# Altium PCB PCB-Support-STM32F407-2layers-polygon-EMI.PcbDoc (part 1 of 3)
Units mm, origin at the board's own origin, x right, y up, seen from the top; angles counter-clockwise.
Board outline 200 x 110 mm, 2 copper layers (Top Layer, Bottom Layer), stack 1.569 mm thick; 116 components, 132 nets, 504 pads, 174 vias.
Unrouted connection lines stored in the file: 143.
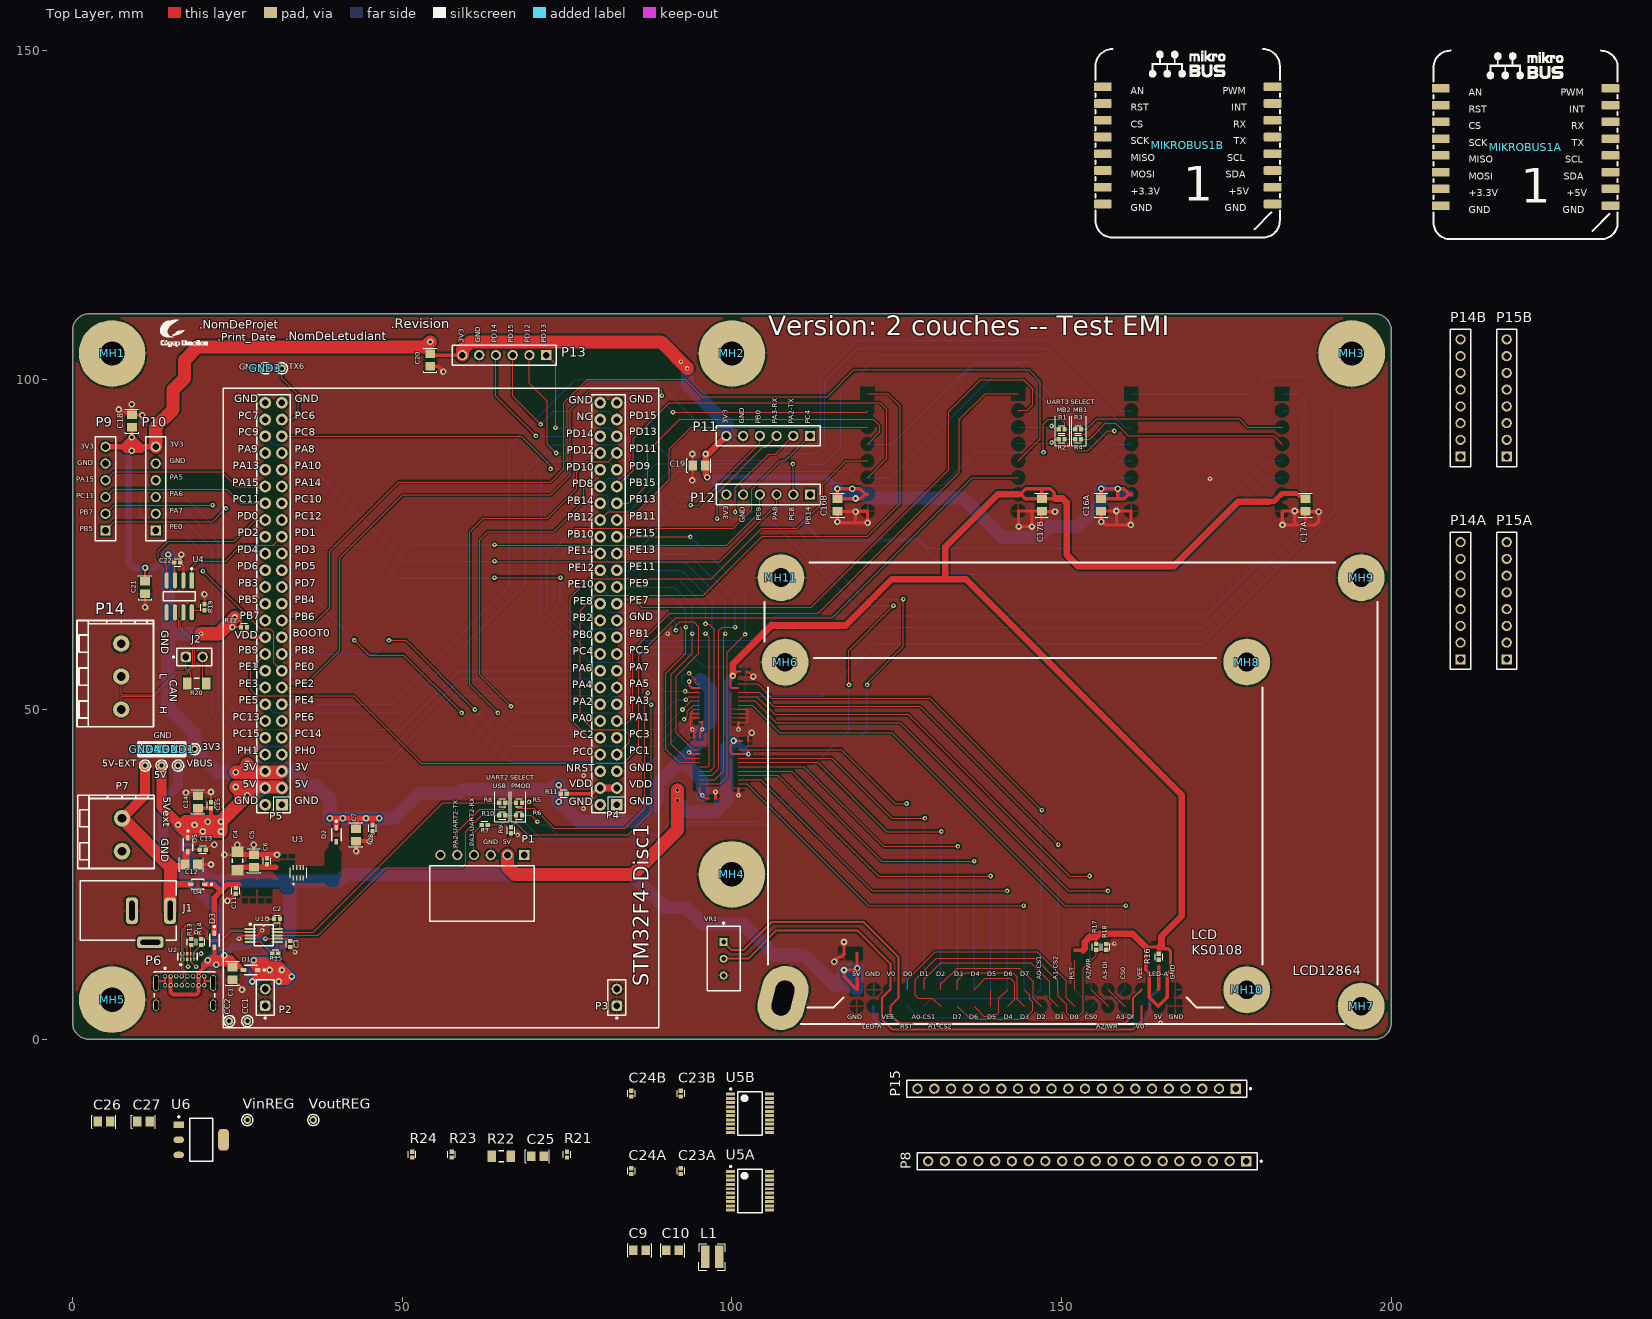
[diagram p0: Top Layer view]
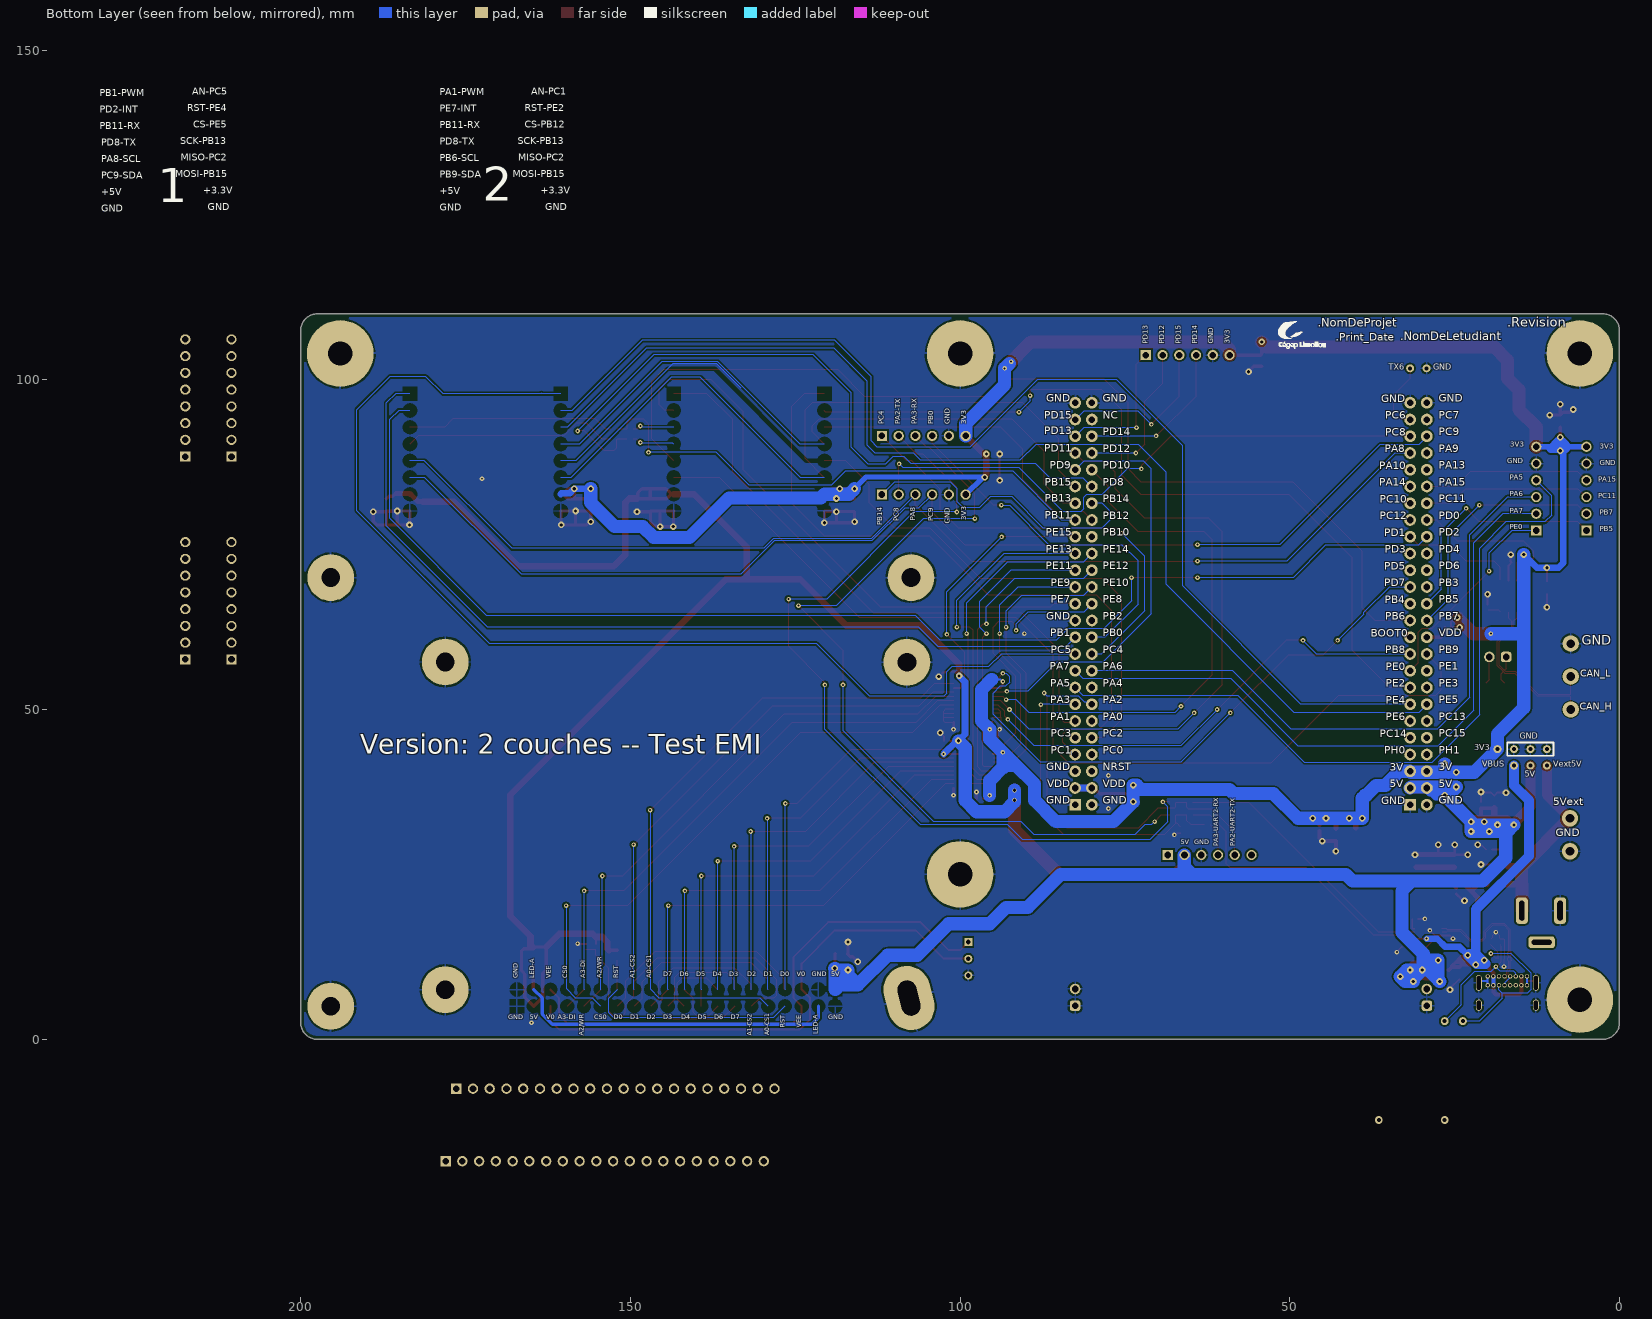
[diagram p1: Bottom Layer view, seen from below]

## Layer stack, top to bottom
Top Solder: solder mask 0.0254, SM-001, Dk 4
Top Layer: signal copper 0.035
Dielectric 1: core 1.4986, Core-043, Dk 4.3
Bottom Layer: signal copper 0.035
Bottom Solder: solder mask 0.0254, SM-001, Dk 4

## Board outline
2.5,0 cw(c2.5,2.5) 0,2.5 0,107.5 cw(c2.5,107.5) 2.5,110 197.5,110 cw(c197.5,107.5) 200,107.5 200,2.5 cw(c197.5,2.5) 197.5,0

## Design rules (kind name [scope] priority, off if disabled: settings)
BoardOutlineClearance [All] p1: gap=0.5 ignorepadtopadclearanceinfootprint=FALSE
Clearance Clearance_diifPair [InDifferentialPair('CAN') or InDifferentialPair('USB_D')] p1: gap=0.125 ignorepadtopadclearanceinfootprint=FALSE
Clearance Clearance_poly [inpoly] p2: gap=0.25 ignorepadtopadclearanceinfootprint=FALSE
Clearance [All] p3: gap=0.15 ignorepadtopadclearanceinfootprint=FALSE
DiffPairsRouting [All] p1: maxlimit=0.125 minlimit=0.125 mostfreqgap=0.125 toplayer_minwidth=0.125 toplayer_maxwidth=0.125 toplayer_prefwidth=0.125 bottomlayer_minwidth=0.125 bottomlayer_maxwidth=0.125 bottomlayer_prefwidth=0.125 maxuncoupledlength=15
HoleSize [All] p1: absolutevalues=TRUE maxlimit=5.5 minlimit=0.2 maxpercent=80.000 minpercent=20.000
HoleToHoleClearance [All] p1: gap=0.3 allowstackedmicrovias=TRUE
MinimumSolderMaskSliver [All] p1: minsoldermaskwidth=0.099
PlaneClearance [All] p1: clearance=0.5
PlaneConnect [All] p1: pad.planeconnectstyle=Relief pad.reliefexpansion=0.25 pad.reliefentries=4 pad.reliefconductorwidth=0.5 pad.reliefairgap=0.25 via.planeconnectstyle=Direct via.reliefexpansion=0.508 via.reliefentries=4 via.reliefconductorwidth=0.254 via.reliefairgap=0.254
PolygonConnect [All] p1: thpad.connectstyle=Relief thpad.reliefconductorwidth=0.3 thpad.reliefentries=4 thpad.polygonreliefangle="90 Angle" thpad.airgapwidth=0.3 smdpad.connectstyle=Relief smdpad.reliefconductorwidth=0.3 smdpad.reliefentries=4 smdpad.polygonreliefangle="90 Angle" smdpad.airgapwidth=0.3 via.connectstyle=Direct via.reliefconductorwidth=0.254 via.reliefentries=4 via.polygonreliefangle="90 Angle" via.airgapwidth=0.254
RoutingVias [All] p1: holewidth=0.5 width=1 viastyle="Through Hole" minholewidth=0.3 minwidth=0.6 maxholewidth=0.7 maxwidth=1.2
SilkToSilkClearance [All] p1: silktosilkclearance=0
SilkToSolderMaskClearance [IsPad] p1: minsilkscreentomaskgap=0 clearancetoexposedcopper=TRUE
SolderMaskExpansion [All] p1: expansion=0.05 istentingtop=FALSE
SupplyNets "Schematic Supply Nets_7" [InNet('VDDB')] p1: voltage=0.000
SupplyNets "Schematic Supply Nets_5" [InNet('VDDA')] p2: voltage=0.000
SupplyNets "Schematic Supply Nets_4" [InNet('V5V_EXT')] p3: voltage=0.000
SupplyNets "Schematic Supply Nets_3" [InNet('VBUS')] p4: voltage=0.000
SupplyNets "Schematic Supply Nets_2" [InNet('VCC_3V3')] p5: voltage=0.000
SupplyNets "Schematic Supply Nets_1" [InNet('VCC_5V')] p6: voltage=0.000
SupplyNets "Schematic Supply Nets" [InNet('GND')] p7: voltage=0.000
Width [All] p1: maxlimit=5 minlimit=0.125 preferedwidth=0.15
22 further rules are at their usual default settings.

## Classes and differential pairs
component class USB-Power: C1 C2 C3 CC1 CC2 P6 R13 R14 R15 U1 U2
channel class Level-Translator: Level-Translator1 Level-Translator2
component class Level-Translator2: C23B C24B U5B
component class Level-Translator1: C23A C24A U5A
component class LCD-Connecteur-ST7920: MH9 MH10 MH11 P15
component class Affichage-LCD: C25 R21 R22 R23 R24 VR1
component class CAN-Driver: C21 C22 J2 P14 R19 R20 U4
net class PMOD: PA5/SPI1-CLK PA6/SPI1-MISO PA7/SPI1-MOSI PA8/I2C3-SCL PA15/D3 PB0/D1 PB5/D0 PB7/D1 PB14/D2 PC4/D0 PC8/D3 PC9/I2C3-SDA PC11/D2 PD12 PD13 PD14 PD15 PE0/CS_B PMOD-RX PMOD-TX
net class MB2: MB1-RX MB1-TX PA8/I2C3-SCL PB1/TIM-3/8 PB13/SPI2-SCK PB15/SPI2-MOSI PC2/SPI2-MISO PC5/ADC12-IN15 PC9/I2C3-SDA PD2/INT PE4/RST PE5/CS
net class MB1: MB2-RX MB2-TX PA1/TIM-2/5 PB6/I2C1-SCL PB9/I2C1-SDA PB12/CS PB13/SPI2-SCK PB15/SPI2-MOSI PC1/ADC123-IN11 PC2/SPI2-MISO PE2/RST PE7/INT
net class LCD: PB8/CS0 PD7/A0 PD9/A1 PD10/A2 PD11/A3 PE8/D0 PE9/D1 PE10/D2 PE11/D3 PE12/D4 PE13/D5 PE14/D6 PE15/D7
net class USB-CAN: PD0/CAN-RX PD1/CAN-TX USB-UART-RX USB-UART-TX
component class U_Alimentation: 3V3 5V 5V-EXT C4 C5 C6 C7 C8 C9 C10 C11 C12 C13 C14 C15 C26 C27 D1 D2 D3 D4 D5 GND1 GND2 GND4 J1 L1 P7 R16 R17 R18 U3 U6 VBUS VinREG VoutREG
component class PMOD-Connecteur: C18 C19 C20 P9 P10 P11 P12 P13 PMOD_1 PMOD_2
channel class MikroBus-Connecteur: "MikroBus-Connecteur 1" "MikroBus-Connecteur 2"
component class "MikroBus-Connecteur 2": C16B C17B MIKROBUS1 MIKROBUS1B P14B P15B
component class "MikroBus-Connecteur 1": C16A C17A MIKROBUS1A MIKROBUS2 P14A P15A
component class LCD-Connecteur-KS0108: MH6 MH7 MH8 P8
component class STM32Disc1-Interface: P2 P3 P4 P5 R11 R12
component class PCB-Support-STM32F407: GND3 m MH1 MH2 MH3 MH4 MH5 P1 R1 R2 R3 R4 R5 R6 R7 R8 R9 R10 TX6
differential pair USB_D: +USB_D_P -USB_D_N
differential pair CAN: +CAN_P -CAN_N

## Components (designator, comment, footprint, x,y, rotation, side; value= is the part's Value field where it differs from the comment)
3V3 "DNP" TP_TH061 18.5,44 r90 top locked
5V "DNP" TP_TH061 13.5,41.5 r90 top locked
5V-EXT "DNP" TP_TH061 11,41.5 r90 top locked
C1 "Cap 4.7uF 0805" C_2012[0805] 24.25,10 r90 top value=4.7uF
C2 "Cap 100nF 0402" C_1005[0402] 31,18.25 r0 top value=100nF
C3 "Cap 100nF 0402" C_1005[0402] 33,14.45 r90 top value=100nF
C4 "Cap 100uF 1206" C_3216[1206] 25,27.05 r270 top value=100uF
C5 "Cap 4.7uF 0805" C_2012[0805] 27.5,27.05 r270 top value=4.7uF
C6 "Cap 100nF 0402" C_1005[0402] 29.5,27 r270 top value=100nF
C7 "Cap 4.7uF 0805" C_2012[0805] 43,31 r90 top value=4.7uF
C8 "Cap 100nF 0402" C_1005[0402] 45.5,32 r90 top value=100nF
C9 "CAP CER 10uF 25V X5R 0805" C_2012[0805] 86,-32 r0 top value=10uF
C10 "CAP CER 10uF 25V X5R 0805" C_2012[0805] 91,-32 r0 top value=10uF
C11 "Cap 100nF 0402" C_1005[0402] 24.75,22.5 r90 top value=100nF
C12 "Cap 4.7uF 0805" C_2012[0805] 18,26.5 r180 top value=4.7uF
C13 "Cap 100nF 0402" C_1005[0402] 19.75,28.75 r180 top value=100nF
C14 "Cap 4.7uF 0805" C_2012[0805] 19,36 r270 top value=4.7uF
C15 "Cap 100nF 0402" C_1005[0402] 21,35.5 r270 top value=100nF
C16A "Cap 4.7uF 0805" C_2012[0805] 156,81 r90 top value=4.7uF (schematic designator C16)
C16B "Cap 4.7uF 0805" C_2012[0805] 116,81 r90 top value=4.7uF (schematic designator C16)
C17A "Cap 4.7uF 0805" C_2012[0805] 187,81 r90 top value=4.7uF (schematic designator C17)
C17B "Cap 4.7uF 0805" C_2012[0805] 147,81 r90 top value=4.7uF (schematic designator C17)
C18 "Cap 4.7uF 0805" C_2012[0805] 9,93.75 r270 top value=4.7uF
C19 "Cap 4.7uF 0805" C_2012[0805] 95,87 r0 top value=4.7uF
C20 "Cap 4.7uF 0805" C_2012[0805] 54.25,103 r90 top value=4.7uF
C21 "Cap 4.7uF 0805" C_2012[0805] 11,68.5 r90 top value=4.7uF
C22 "Cap 100nF 0402" C_1005[0402] 15.89,72.31 r180 top value=100nF
C23A "Cap 100nF 0402" C_1005[0402] 92.25,-20 r90 top value=100nF (schematic designator C23)
C23B "Cap 100nF 0402" C_1005[0402] 92.25,-8.25 r90 top value=100nF (schematic designator C23)
C24A "Cap 100nF 0402" C_1005[0402] 84.75,-20 r90 top (schematic designator C24)
C24B "Cap 100nF 0402" C_1005[0402] 84.75,-8.25 r90 top (schematic designator C24)
C25 "Cap 4.7uF 0805" C_2012[0805] 70.499,-17.75 r0 top value=4.7uF
C26 "CAP CER 10uF 25V X5R 0805" C_2012[0805] 4.75,-12.5 r0 top value=DNP
C27 "CAP CER 10uF 25V X5R 0805" C_2012[0805] 10.75,-12.5 r0 top value=DNP
CC1 "DNP" TP_TH061 26.5,2.75 r0 top
CC2 "DNP" TP_TH061 23.75,2.75 r90 top
D1 "BAT60JFILM" SOD323 27,10.5 r180 top
D2 "BAT60JFILM" SOD323 40,31 r270 top
D3 "BAT60JFILM" SOD323 21.5,15 r270 top
D4 "BAT60JFILM" SOD323 19,23.5 r180 top
D5 "BAT60JFILM" SOD323 17.5,29.5 r270 top
GND1 "GND" TP_TH061 16,44 r0 top locked value=DNP
GND2 "GND" TP_TH061 13.5,44 r90 top locked value=DNP
GND3 "GND" TP_TH061 29.25,101.75 r0 top value=DNP
GND4 "GND" TP_TH061 11,44 r0 top locked value=DNP
J1 "694106301002" CONN_DC-JACK_RA 8.45,19.5 r270 top
J2 "61300211121" CONN_HDR_2POS_100MILS_TH 18.455,57.975 r0 top value=R120
L1 "Ind 1UH 2.75A 51mOHM SMD" L_3030[1212] 97,-33 r0 top value=1uH
MH1 "DNP" MP_M-Hole_#4-40_LOOSE-FIT 6,104 r0 top locked
MH2 "DNP" MP_M-Hole_#4-40_LOOSE-FIT 100,104 r90 top locked
MH3 "DNP" MP_M-Hole_#4-40_LOOSE-FIT 194,104 r90 top locked
MH4 "DNP" MP_M-Hole_#4-40_LOOSE-FIT 100,25 r0 top locked
MH5 "DNP" MP_M-Hole_#4-40_LOOSE-FIT 6,6 r0 top locked
MH6 "DNP" MP_M-Hole_M2.5x0.45mm_LOOSE-FIT 108.066,57.184 r90 top
MH7 "DNP" MP_M-Hole_M2.5x0.45mm_LOOSE-FIT 195.441,5.009 r90 top locked
MH8 "DNP" MP_M-Hole_M2.5x0.45mm_LOOSE-FIT 178.066,57.209 r90 top locked
MH9 "DNP" MP_M-Hole_M2.5x0.45mm_LOOSE-FIT 195.441,70.009 r90 top locked
MH10 "DNP" MP_M-Hole_M2.5x0.45mm_LOOSE-FIT 178.066,7.509 r90 top locked
MH11 "DNP" MP_M-Hole_M2.5x0.45mm_LOOSE-FIT 107.441,70.009 r90 top locked
MIKROBUS1A "MIKROBUS HOST CONN." "MIKROBUS HOST CONN. SMD-NO HOLE" 220.37,134.472 r0 top (schematic designator MIKROBUS1)
MIKROBUS1B "MIKROBUS HOST CONN." "MIKROBUS HOST CONN. SMD-NO HOLE" 169.12,134.722 r0 top (schematic designator MIKROBUS1)
P1 "PPTC061LGBN-RC" P_CONN_HDR_1ROW_6POS_RA_100MIL 62.15,27.94 r180 top
P2 "ZX-PM2.54-1-2PY" CONN_SKT_2POS_100MILS_TH 29.21,6.35 r90 top
P3 "ZX-PM2.54-1-2PY" CONN_SKT_2POS_100MILS_TH 82.55,6.35 r90 top
P4 "ZX-PM2.54-2-25PY" CONN-HEAD02X25-100MIL 81.28,66.04 r90 top
P5 "ZX-PM2.54-2-25PY" CONN-HEAD02X25-100MIL 30.48,66.04 r90 top
P6 "USB4085-GF-A" FP-USB4085-GF-A-MFG 17,5.5 r0 top
P7 "ZX-DG28V-5.0-2P" CONN_TERM_BLOCK_2POS_5mm_Model1 7.5,31 r90 top
P8 "ESQ-120-14-G-S" CONN-SKT-20POS-100MIL 153.89,-18.5 r180 top
P9 "ZX-PM2.54-1-6PY" CONN_SKT_01X06_100MIL 5,83.5 r90 top locked
P10 "ZX-PM2.54-1-6PY" CONN_SKT_01X06_100MIL 12.62,83.5 r90 top locked
P11 "ZX-PM2.54-1-6PY" CONN_SKT_01X06_100MIL 105.5,91.5 r180 top
P12 "ZX-PM2.54-1-6PY" CONN_SKT_01X06_100MIL 105.5,82.61 r180 top
P13 "ZX-PM2.54-1-6PY" CONN_SKT_01X06_100MIL 65.48,103.75 r180 top
P14 "ZX-DG28V-5.0-3P" CONN_TERM_BLOCK_3POS_5mm_Model1 7.381,55.006 r90 top value=CAN
P14A "ZX-PM2.54-1-8PY" CONN_SKT_01X08_100MIL 210.5,66.5 r90 top (schematic designator P14)
P14B "ZX-PM2.54-1-8PY" CONN_SKT_01X08_100MIL 210.5,97.25 r90 top (schematic designator P14)
P15 "ESQ-120-14-G-S" CONN-SKT-20POS-100MIL 152.28,-7.5 r180 top
P15A "ZX-PM2.54-1-8PY" CONN_SKT_01X08_100MIL 217.5,66.5 r90 top (schematic designator P15)
P15B "ZX-PM2.54-1-8PY" CONN_SKT_01X08_100MIL 217.5,97.25 r90 top (schematic designator P15)
R1 "Res 0R 0402" R_1005[0402] 150,92.5 r0 top value=DNP
R2 "Res 0R 0402" R_1005[0402] 150,91 r0 top value=DNP
R3 "Res 0R 0402" R_1005[0402] 152.5,92.5 r180 top value=0R
R4 "Res 0R 0402" R_1005[0402] 152.5,91 r180 top value=0R
R5 "Res 0R 0402" R_1005[0402] 67.71,35.865 r180 top value=DNP
R6 "Res 0R 0402" R_1005[0402] 67.71,33.96 r180 top value=DNP
R7 "Res 5k1 1% 0402" R_1005[0402] 62.5,32.5 r180 top value=5k1
R8 "Res 0R 0402" R_1005[0402] 65.17,35.865 r0 top value=0R
R9 "Res 10k 1% 0402" R_1005[0402] 66.5,31.7 r90 top value=10k
R10 "Res 0R 0402" R_1005[0402] 65.17,33.96 r0 top value=0R
R11 "Res 0R 0402" R_1005[0402] 74.5,37.25 r0 top value=0R
R12 "Res 0R 0402" R_1005[0402] 26,62.5 r0 top value=0R
R13 "Res 5k1 1% 0402" R_1005[0402] 18,14.75 r270 top value=5k1
R14 "Res 5k1 1% 0402" R_1005[0402] 19.5,14.75 r270 top value=5k1
R15 "Res 4k7 1% 0402" R_1005[0402] 30.75,13 r0 top value=DNP
R16 "Res 91k 1% 0402" R_1005[0402] 164.75,12.5 r270 top value=91k
R17 "Res 511k 1% 0402" R_1005[0402] 155.25,14 r90 top value=511k
R18 "Res 10k 1% 0402" R_1005[0402] 156.75,14 r270 top value=10k
R19 "Res 10k 1% 0402" R_1005[0402] 20,65.5 r270 top value=10k
R20 "Res 120R 1206" R_3216[1206] 18.825,53.975 r0 top value=120R
R21 "Res 10k 1% 0402" R_1005[0402] 74.999,-17.5 r90 top value=10k
R22 "Res 20R 1206" R_3216[1206] 65,-17.75 r0 top value=20R
R23 "Res 49k9 1% 0402" R_1005[0402] 57.5,-17.5 r90 top value=49k9
R24 "Res 49k9 1% 0402" R_1005[0402] 51.5,-17.5 r90 top value=DNP
TX6 "DNP" TP_TH061 31.75,101.75 r0 top
U1 "CH340X" U_MSOP50P300X500-10(RM-10)_WO-TP 29,15.75 r270 top
U2 "TPD4E05U06QDQARQ1" U_USON50P250X100-10 17.405,12.565 r180 top
U3 "TPS631000DRLR" U_SOT583_50P210X120X60-8 34.25,25.25 r0 top
U4 "SN65HVD230DR" SOIC-8 16.17,67.166 r270 top
U5A "TXB0108PWR" U_TSSOP65P660X450-20 102.749,-23 r0 top (schematic designator U5)
U5B "TXB0108PWR" U_TSSOP65P660X450-20 102.749,-11.25 r0 top (schematic designator U5)
U6 "AMS1117-3.3" SOT-223 19.5,-15.25 r0 top value=DNP
VBUS "DNP" TP_TH061 16,41.5 r90 top
VinREG "DNP" TP_TH061 26.499,-12.25 r90 top
VoutREG "DNP" TP_TH061 36.499,-12.25 r90 top
VR1 "3296W-1-103LF" R-POT-TH-TOP 98.745,12.21 r180 top

## Footprints (in the part's own frame and the unit in brackets; to place one, negate y for a bottom-side part, rotate by r counter-clockwise, add the part's x,y. Pads: shape width x height; smd on the part's side, far side on the other; paste and mask are expansions set on the pad)
C_1005[0402] [mm] "Capacitor MLCC; Body 1.1 x 0.5 mm (LxW typ)"
  rect 0.65x0.65 smd mask+0.075: 1(-0.45,0) 2(0.45,0)
  silkscreen extent -0.5,-0.57 0.5,0.58, body extent -0.51,-0.25 0.51,0.25, height 0.51
C_2012[0805] [mm] "Capacitor MLCC; Body 2.0 x 1.3 mm (LxW typ)"
  rect 1.3x1.5 smd: 1(-0.95,0) 2(0.95,0)
  silkscreen extent -1.83,-1 1.83,1, body extent -1,-0.62 1,0.63, height 0.78
C_3216[1206] [mm] "Capacitor MLCC; Body 3.2 x 1.6 mm (LxW typ)"
  rect 1.6x1.8 smd: 1(-1.4,0) 2(1.4,0)
  silkscreen extent -0.3,-0.8 0.3,0.8, body extent -1.6,-0.8 1.6,0.8, height 1
CONN-HEAD02X25-100MIL [mil]
  rect 70x70 hole 39.37: 1(-1200,-50)
  round 70 hole 39.37: 2(-1200,50) 3(-1100,-50) 4(-1100,50) 5(-1000,-50) 6(-1000,50) 7(-900,-50) 8(-900,50) 9(-800,-50) 10(-800,50) 11(-700,-50) 12(-700,50) 13(-600,-50) 14(-600,50) 15(-500,-50) 16(-500,50) 17(-400,-50) 18(-400,50) 19(-300,-50) 20(-300,50) 21(-200,-50) 22(-200,50) 23(-100,-50) 24(-100,50) 25(0,-50) 26(0,50) 27(100,-50) 28(100,50) 29(200,-50) 30(200,50) 31(300,-50) 32(300,50) 33(400,-50) 34(400,50) 35(500,-50) 36(500,50) 37(600,-50) 38(600,50) 39(700,-50) 40(700,50) 41(800,-50) 42(800,50) 43(900,-50) 44(900,50) 45(1000,-50) 46(1000,50) 47(1100,-50) 48(1100,50) 49(1200,-50) 50(1200,50)
  silkscreen extent -1248,-101 1248,100, body extent -1350,-158 1350,118, height 335
CONN-SKT-20POS-100MIL [mm]
  rect 1.57x1.57 hole 1 paste-2539.97 mask+0: 1(-24.13,0)
  round 1.57 hole 1 paste-2539.97 mask+0: 2(-21.59,0) 3(-19.05,0) 4(-16.51,0) 5(-13.97,0) 6(-11.43,0) 7(-8.89,0) 8(-6.35,0) 9(-3.81,0) 10(-1.27,0) 11(1.27,0) 12(3.81,0) 13(6.35,0) 14(8.89,0) 15(11.43,0) 16(13.97,0) 17(16.51,0) 18(19.05,0) 19(21.59,0) 20(24.13,0)
  silkscreen extent -26.51,-1.27 25.78,1.27, body extent -25.88,-1.37 25.88,1.37, height 0.25
CONN_DC-JACK_RA [mm] "DC Power Jack Right Angle"
  rrect50% 4x1.8 hole 0.8 slot 3 at 0 deg: 1(0,6.35) 2(0,0.55)
  rrect50% 1.8x4 hole 0.8 slot 3 at 90 deg: 3(4.8,3.35)
  silkscreen extent -4.5,-7.25 4.5,7.25, body extent -4.5,-7.25 5,7.25, height 10.75
CONN_HDR_2POS_100MILS_TH [mm] "Pin Header, pitch 2.54 mm, THT, Vertical, single row, 2p"
  rrect50% 1.6x1.6 hole 1: 1(-1.27,0)
  round 1.6 hole 1: 2(1.27,0)
  silkscreen extent -3.26,-1.35 2.69,1.35, body extent -2.54,-1.27 2.54,1.27, height 8.57
CONN_SKT_01X06_100MIL [mm] "SQ Post Socket, 1x6 Pins, Vertical, 2.54mm Pitch, Female"
  rect 1.55x1.55 hole 1: 1(-6.35,0)
  round 1.55 hole 1: 2(-3.81,0) 3(-1.27,0) 4(1.27,0) 5(3.81,0) 6(6.35,0)
  silkscreen extent -7.87,-1.52 7.88,1.52, body extent -7.62,-1.27 7.62,1.27, height 4.57
CONN_SKT_01X08_100MIL [mm] "SQ Post Socket, 1x8 Pins, Vertical, 2.54mm Pitch, Female"
  rect 1.55x1.55 hole 1: 1(-8.89,0)
  round 1.55 hole 1: 2(-6.35,0) 3(-3.81,0) 4(-1.27,0) 5(1.27,0) 6(3.81,0) 7(6.35,0) 8(8.89,0)
  silkscreen extent -10.41,-1.52 10.42,1.52, body extent -10.41,-1.21 10.41,1.21, height 8.51
CONN_SKT_2POS_100MILS_TH [mm] "Receptacle, pitch 2.54 mm, THT, Vertical, single row, 2p"
  rrect50% 1.6x1.6 hole 1: 1(-1.27,0)
  round 1.6 hole 1: 2(1.27,0)
  silkscreen extent -3.26,-1.35 2.69,1.35, body extent -2.79,-1.27 2.79,1.27, height 8.51
CONN_TERM_BLOCK_2POS_5mm_Model1 [mm] "Terminal Block 2 positions Throught hole"
  round 2.5 hole 1.3: 1(-2.5,0) 2(2.5,0)
  silkscreen extent -5.1,-4.9 6,6.7, body extent -4.98,-4.7 5.59,4.8, height 15.1
CONN_TERM_BLOCK_3POS_5mm_Model1 [mm] "Terminal Block 3 positions Throught hole"
  round 2.5 hole 1.3: 1(-5,0) 2(0,0) 3(5,0)
  silkscreen extent -7.6,-4.9 8.5,6.7, body extent -7.49,-4.8 8.08,4.7, height 15.1
FP-USB4085-GF-A-MFG [mm]
  rrect100% 0.9x2.4 hole 2.1 slot 0.6 at 0 deg paste-2539.97 mask+0: 1(-4.325,3.045) 2(4.325,3.045)
  rrect100% 0.9x1.7 hole 1.4 slot 0.6 at 0 deg paste-2539.97 mask+0: 3(-4.325,-0.335) 4(4.325,-0.335)
  round 0.65 hole 0.4 paste-2539.97 mask+0: A1(-2.975,4.025) A4(-2.125,4.025) A5(-1.275,4.025) A6(-0.425,4.025) A7(0.425,4.025) A8(1.275,4.025) A9(2.125,4.025) A12(2.975,4.025) B1(2.975,2.675) B4(2.125,2.675) B5(1.275,2.675) B6(0.425,2.675) B7(-0.425,2.675) B8(-1.275,2.675) B9(-2.125,2.675) B12(-2.975,2.675)
  silkscreen extent -4.57,0.89 4.57,5.37, body extent -4.87,-4.83 4.87,4.83, height 0.25
L_3030[1212] [mm] "Inductor, 2-Leads, Body 3,00x3,00mm"
  rect 1.3x3.4 smd: 1(-1.05,0) 2(1.05,0)
  silkscreen extent -2.01,-2.01 2.01,2.01, body extent -1.5,-1.5 1.5,1.5, height 1.5
"MIKROBUS HOST CONN. SMD-NO HOLE" [mm]
  rrect20% 2.7x1.3 smd mask+0.076: 1(-12.88,9.728) 2(-12.88,7.188) 3(-12.88,4.648) 4(-12.88,2.108) 5(-12.88,-0.432) 6(-12.88,-2.972) 7(-12.88,-5.512) 8(-12.88,-8.052) 9(12.88,-8.052) 10(12.88,-5.512) 11(12.88,-2.972) 12(12.88,-0.432) 13(12.88,2.108) 14(12.88,4.648) 15(12.88,7.188) 16(12.88,9.728)
  silkscreen extent -13.97,-13.13 13.97,15.44, body extent -13.72,-11.88 13.74,11.02, height 11.01
MP_M-Hole_#4-40_LOOSE-FIT [mm] "Monting Hole #4-40 Loose Fit"
  round 10.1 hole 3.7 paste-2539.97: 1(0,0)
MP_M-Hole_M2.5x0.45mm_LOOSE-FIT [mm] "Monting Hole M2.5x0.45mm LOOSE Fit"
  round 7.1 hole 2.85 paste-2539.97: 1(0,0)
P_CONN_HDR_1ROW_6POS_RA_100MIL [mm] "Header, 1x6 Pins, Right Angle, 2.54mm Pitch, Female"
  rect 1.55x1.55 hole 1: 1(-6.35,0)
  round 1.55 hole 1: 2(-3.81,0) 3(-1.27,0) 4(1.27,0) 5(3.81,0) 6(6.35,0)
  silkscreen extent -7.87,1.65 7.95,10.03, body extent -7.85,-0.3 7.9,9.94, height 2.46
R-POT-TH-TOP [mm]
  rect 1.2x1.2 hole 0.7 paste-2539.97 mask+0: 1(0.005,-2.54)
  round 1.2 hole 0.7 paste-2539.97 mask+0: 2(0.005,0) 3(0.005,2.54)
  silkscreen extent -2.48,-5.52 2.48,4.89, body extent -2.58,-4.99 2.58,4.99, height 0.25
R_1005[0402] [mm] "Chip Resistor; Body 1.1 x 0.5 mm (LxW typ)"
  rect 0.65x0.65 smd mask+0.075: 1(-0.45,0) 2(0.45,0)
  silkscreen extent -0.5,-0.57 0.5,0.58, body extent -0.5,-0.25 0.5,0.26, height 0.36
R_3216[1206] [mm] "Chip Resistor, Body 3.2x1.6mm, IPC Medium Density"
  rect 1.3x1.8 smd: 1(-1.45,0) 2(1.45,0)
  silkscreen extent -0.4,-0.8 0.4,0.8, body extent -1.6,-0.8 1.6,0.8, height 0.55
SOD323 [mm]
  rect 0.86x0.54 smd paste+0 mask+0: 1(-1.07,0) 2(1.07,0)
  silkscreen extent -2.2,-0.72 0.9,0.72, body extent -1.6,-0.82 1.6,0.82, height 0.25
SOIC-8 [mm]
  rect 2.469x0.622 smd paste+0 mask+0: 1(-2.414,1.905)
  rrect100% 2.469x0.622 smd paste+0 mask+0: 2(-2.414,0.635) 3(-2.414,-0.635) 4(-2.414,-1.905) 5(2.414,-1.905) 6(2.414,-0.635) 7(2.414,0.635) 8(2.414,1.905)
  silkscreen extent -4.32,-2.45 0.68,2.45, body extent -4.15,-2.95 4.15,2.95, height 0.25
SOT-223 [mm]
  rect 1.604x0.952 smd paste+0 mask+0: 1(-3.395,2.29)
  rrect100% 1.604x0.952 smd paste+0 mask+0: 2(-3.395,0) 3(-3.395,-2.29)
  rrect59% 1.604x3.262 smd paste+0 mask+0: 4(3.395,0)
  silkscreen extent -3.52,-3.25 1.75,3.62, body extent -4.7,-3.75 4.7,3.75, height 0.25
TP_TH061 [mm] "Test point hole 0.61mm diameter (AWG28)"
  round 1.2 hole 0.61: 1(0,0)
  silkscreen extent -0.85,-0.85 0.85,0.85
U_MSOP50P300X500-10(RM-10)_WO-TP [mm] "Shrink Small Outline; 10 Leads; Body Width 3 mm; Pitch 0.5 mm"
  oval 0.3x1.7 smd mask+0.05: 1(-1,-2.05) 2(-0.5,-2.05) 3(0,-2.05) 4(0.5,-2.05) 5(1,-2.05) 6(1,2.05) 7(0.5,2.05) 8(0,2.05) 9(-0.5,2.05) 10(-1,2.05)
  silkscreen extent -1.82,-2.17 1.58,1.43, body extent -1.6,-2.58 1.6,2.57, height 1.09
U_SOT583_50P210X120X60-8 [mil] "SOT-583"
  rect 9x28 smd paste+0 mask+0: 1(-29.53,-31.5) 2(-9.84,-31.5) 3(9.84,-31.5) 4(29.53,-31.5) 5(29.53,31.5) 6(9.84,31.5) 7(-9.84,31.5) 8(-29.53,31.5)
  silkscreen extent -48,-71 48,30, body extent -44,-34 44,34, height 27
U_TSSOP65P660X450-20 [mm] "SOP, 20-Leads, Body 6.6x4.5mm, Pitch 0.65mm, IPC Medium Density"
  rrect22% 1.4x0.45 smd: 1(-2.95,2.925) 2(-2.95,2.275) 3(-2.95,1.625) 4(-2.95,0.975) 5(-2.95,0.325) 6(-2.95,-0.325) 7(-2.95,-0.975) 8(-2.95,-1.625) 9(-2.95,-2.275) 10(-2.95,-2.925) 11(2.95,-2.925) 12(2.95,-2.275) 13(2.95,-1.625) 14(2.95,-0.975) 15(2.95,-0.325) 16(2.95,0.325) 17(2.95,0.975) 18(2.95,1.625) 19(2.95,2.275) 20(2.95,2.925)
  silkscreen extent -3.07,-3.3 1.85,3.82, body extent -3.21,-3.25 3.21,3.25, height 1
U_USON50P250X100-10 [mm]
  rrect50% 0.2x0.565 smd paste+0 mask+0: 1(1,0.417) 2(0.5,0.417) 4(-0.5,0.417) 5(-1,0.417) 6(-1,-0.417) 7(-0.5,-0.417) 9(0.5,-0.417) 10(1,-0.417)
  rrect25% 0.4x0.565 smd paste-0.025 mask+0: 3(0,0.417) 8(0,-0.417)
  silkscreen extent -1.48,-0.55 1.48,1.37, body extent -1.4,-0.8 1.4,0.8, height 0.25

## Part data
3V3 5V 5V-EXT CC1 CC2 TX6 VBUS VinREG VoutREG: library part TP_TH0.61mm(AWG28), "Pad TH 0.61mm diameter (AWG28)", Supplier Part Number 1=N/A, Manufacturer Part Number 1=DNP, Supplier 1=N/A
C1 C5 C7 C12 C14 C16A C16B C17A C17B C18 C19 C20 C21 C25: library part CAP003, "Capacitor type 1", Dielectric=X7R, Manufacturer 1="Taiyo Yuden", Manufacturer Part Number 1=TMK212AB7475KG-T, Rated Voltage=25V, Supplier Part Number 1=C163186, Tolerance=10%, CEGEP=KCOND02SM, LibRef=CAP003, Mounting Technology=SMT, Supplier 1=LCSC
C2 C3 C6 C8 C11 C13 C15 C22 C23A C23B C24A C24B: library part CAP001, "Capacitor type 1", Dielectric=X7R, Manufacturer 1="Taiyo Yuden", Manufacturer Part Number 1=UMK105B7104KV-FR, Rated Voltage=50V, Supplier Part Number 1=C2167491, Tolerance=10%, CEGEP=KCOND01SM, LibRef=CAP001, Mounting Technology=SMT, Supplier 1=LCSC
C4: library part CAP005, "Capacitor type 1", Dielectric=X5R, Manufacturer 1=Murata, Manufacturer Part Number 1=GRM31CR61A107MEA8L, Rated Voltage=10V, Supplier Part Number 1=C883598, Tolerance=20%, CEGEP=KCOND04SM, LibRef=CAP005, Mounting Technology=SMT, Supplier 1=LCSC
C9 C10 C26 C27: library part CAP020, "Capacitor type 1", Dielectric=X5R, Manufacturer 1=Samsung, Manufacturer Part Number 1=CL21A106KAYNNNE, Rated Voltage=25V, Supplier Part Number 1=C15850, Tolerance=10%, LibRef=CAP020, Mounting Technology=SMT, Supplier 1=LCSC
D1 D2 D3 D4 D5: library part D_BAT60, "DIODE SCHOTTKY 10V 3A SOD323", Manufacturer 1=ST, Supplier Part Number 1=C133103, Manufacturer Part Number 1=BAT60JFILM, Mounting Technology=SMT, Supplier 1=LCSC
GND1 GND2 GND3 GND4: library part TP_TH0.61mm(AWG28), "Pad TH 0.61mm diameter (AWG28)", Manufacturer Part Number 1=DNP, Supplier Part Number 1=N/A, Supplier 1=N/A
J1: library part CONN-DC-JACK-2MM5, "DC Barrel Connector 2.5mm", Manufacturer 1="XKB Connection", Manufacturer Part Number 1=DC-005-5A-2.5, Supplier Part Number 1=C381115, Mounting Technology=TH, Supplier 1=LCSC
J2: library part CONN-100MIL-HDR-01X02, "CONN HEADER 2POS 100MIL", Manufacturer 1=Megastar, Manufacturer 2="Würth Elektronik", Manufacturer Part Number 1=ZX-PZ2.54-1-2PZZ, Supplier Part Number 1=C7501260, Manufacturer Part Number 2=61300211121, Mounting Technology=TH, Supplier 1=LCSC
L1: library part IND001, "Inductor type 1", Manufacturer 1="Murata Electronics", Manufacturer Part Number 1=LQH3NPN1R0MMEL, Saturation Current=2.3A, Supplier Part Number 1=C703777, Tolerance=0,2, CEGEP=KPTSO09, DCR=0.025R, LibRef=IND001, Mounting Technology=SMT, Supplier 1=LCSC
MH1 MH2 MH3 MH4 MH5: library part MH-4-40, "Mounting Hole #4-40 w/ Flat Washer", Supplier Part Number 1=N/A, Manufacturer Part Number 1=DNP
MH6 MH7 MH8 MH9 MH10 MH11: library part MH-2.5MM, "Mounting Hole 2.5mm w/ Flat Washer", Supplier Part Number 1=N/A, Manufacturer Part Number 1=DNP
MIKROBUS1A MIKROBUS1B: library part MIKROBUS-HOST-CONN, "mikroBUS Host Socket"
P1: library part CONN-100MIL-SKT-01X06_RA, "CONN SOCKET 6pos 100mils Right Angle", Manufacturer 1=Megastar, Manufacturer 2=Sullins, Manufacturer 3=Samtec, Manufacturer Part Number 1=ZX-PM2.54-1-6PWZ, Manufacturer Part Number 3=SSW-106-02-T-S-RA, Supplier Part Number 1=C49326178, Manufacturer Part Number 2=PPTC061LGBN-RC, Mounting Technology=TH, Supplier 1=LCSC, Supplier 2=Digikey, Supplier Part Number 2=S5442-ND
P2 P3: library part CONN-100MIL-SKT-01X02, "CONN SOCKET 2pins single row , 100mils TH", Manufacturer 1=Megastar, Manufacturer 2="Würth Elektronik", Manufacturer Part Number 2=61300211121, Supplier Part Number 1=C7499322, Manufacturer Part Number 1=ZX-PM2.54-1-2PY, Mounting Technology=TH, Supplier 1=LCSC
P4 P5: library part CONN-100MIL-SKT-02X25, "CONN SOCKET 2x25POS, Dual row 100MIL", Manufacturer 1=Megastar, Manufacturer 2=Sullins, Manufacturer Part Number 2=SFH11-PBPC-D25-ST-BK, Supplier Part Number 1=C7499355, Manufacturer Part Number 1=ZX-PM2.54-2-25PY, Mounting Technology=TH, Supplier 1=LCSC, Supplier 2=Digikey, Supplier Part Number 2=S9201-ND
P6: library part CONN-USB-C-16POS, "CONN RCPT USB2.0 TYPE C RA - TH", Manufacturer 1="Global Connector Technology", Supplier Part Number 1=C7095263, Code CEGEP="? (R13-B182)", Manufacturer Part Number 1=USB4085-GF-A, Mounting Technology=TH, Supplier 1=LCSC, Supplier 2=Digikey, Supplier Part Number 2=2073-USB4085-GF-ACT-ND
P7: library part CONN-5MM-2POS-TERM-BLOCK, "CONN TERM BLOCK 2POS 5mm pitch", Manufacturer 1=Megastar, Manufacturer 2="Weidmüller - Phoenix Contact", Manufacturer Part Number 2="1760510000 - 1890963", Supplier Part Number 1=C49022995, Code CEGEP=CONWECO0002, Manufacturer Part Number 1=ZX-DG28V-5.0-2P, Mounting Technology=TH, Supplier 1=LCSC
P8 P15: library part CONN-100MIL-SKT-01X20, "CONN SOCKET 20POS 2.54MM", Manufacturer 1=Megastar, Manufacturer Part Number 1=ZX-PM2.54-1-20PY, Supplier Part Number 1=C7499336, Code CEGEP=KCONDIV0053, Localisation=R13-B035, Mounting Technology=TH, Supplier 1=LCSC
P9 P10 P11 P12 P13: library part CONN-100MIL-SKT-01X06, "CONN SOCKET 6pos 100mils", Manufacturer 1=Megastar, Supplier Part Number 1=C7499326, Manufacturer Part Number 1=ZX-PM2.54-1-6PY, Mounting Technology=TH, Supplier 1=LCSC
P14: library part CONN-5MM-3POS-TERM-BLOCK, "CONN TERM BLOCK 3POS 5mm pitch", Manufacturer 1=Megastar, Manufacturer 2="Weco - Phoenix Contact", Manufacturer Part Number 2="950-DS/03 - 1890976", Code CEGEP=CONWECO0003, Manufacturer Part Number 1=ZX-DG28V-5.0-3P, Mounting Technology=TH, Supplier 1=LCSC, Supplier Part Number 1=ZX-DG28V-5.0-3P
P14A P14B P15A P15B: library part CONN-100MIL-SKT-01X08, "CONN SOCKET 8pos 100mils", Manufacturer 1=Megastar, Supplier Part Number 1=C7499328, Manufacturer Part Number 1=ZX-PM2.54-1-8PY, Mounting Technology=TH, Supplier 1=LCSC
R1 R2 R3 R4 R5 R6 R8 R10 R11 R12: library part RES005, "Resistor type 1", Manufacturer 1=Yageo, Manufacturer Part Number 1=RC0402JR-070RL, Max Working Voltage=50V, Supplier Part Number 1=C60485, LibRef=RES005, Mounting Technology=SMT, Supplier 1=LCSC
R7 R13 R14: library part RES010, "Resistor type 1", Manufacturer 1=Panasonic, Manufacturer Part Number 1=ERJ-2RKF5101X, Max Working Voltage=50V, Supplier Part Number 1=C25905, Tolerance=1%, LibRef=RES010, Mounting Technology=SMT, Puissance=1/16W, Supplier 1=LCSC
R9 R18 R19 R21: library part RES003, "Resistor type 1", Manufacturer 1=Vishay, Manufacturer Part Number 1=CR0402F1002T1LF, Max Working Voltage=50V, Supplier Part Number 1=541-10.0KLCT-ND, Tolerance=1%, LibRef=RES003, Mounting Technology=SMT, Puissance=1/16W, Supplier 1=Digikey
R15: library part RES007, "Resistor type 1", Manufacturer 1=Panasonic, Manufacturer Part Number 1=ERJ-2RKF4701X, Max Working Voltage=50V, Supplier Part Number 1=C400631, Tolerance=1%, LibRef=RES007, Mounting Technology=SMT, Puissance=1/16W, Supplier 1=LCSC
R16: library part RES011, "Resistor type 1", Manufacturer 1=Yageo, Manufacturer Part Number 1=RC0402FR-0791KL, Max Working Voltage=50V, Supplier Part Number 1=C327323, Tolerance=1%, Code CEGEP=RES91KSM, LibRef=RES011, Mounting Technology=SMT, Puissance=1/16W, Supplier 1=LCSC
R17: library part RES012, "Resistor type 1", Manufacturer 1=Yageo, Manufacturer Part Number 1=RC0402FR-07511KL, Max Working Voltage=50V, Supplier Part Number 1=C163461, Tolerance=1%, Code CEGEP=RES511KSM, LibRef=RES012, Mounting Technology=SMT, Puissance=1/16W, Supplier 1=LCSC
R20: library part RES014, "Resistor type 1", Manufacturer 1=Yageo, Manufacturer Part Number 1=RC1206FR-07120RL, Max Working Voltage=200V, Supplier Part Number 1=C114928, Tolerance=1%, CEGEP=RESI0043SMT, LibRef=RES014, Mounting Technology=SMT, Puissance=1/4W, Supplier 1=LCSC, Supplier 2=Digikey, Supplier Part Number 2=P120ECT-ND
R22: library part RES020, "Resistor type 1", Manufacturer 1=Yageo, Manufacturer Part Number 1=RC1206FR-0720RL, Max Working Voltage=200V, Supplier Part Number 1=C114941, Tolerance=1%, CEGEP=RESI00020SMT, LibRef=RES020, Mounting Technology=SMT, Puissance=1/4W, Supplier 1=LCSC
R23 R24: library part RES026, "Resistor type 1", Manufacturer 1=Yageo, Manufacturer Part Number 1=RC0402FR-0749k9L, Max Working Voltage=50V, Supplier Part Number 1=C137969, Tolerance=1%, LibRef=RES026, Mounting Technology=SMT, Puissance=1/16W, Supplier 1=LCSC
U1: library part U_CH340X, "IC USB to Serial Port", Manufacturer 1="WCH(Jiangsu Qin Heng)", Supplier Part Number 1=C3035748, Code CEGEP=KPTSO02, Manufacturer Part Number 1=CH340X, Mounting Technology=SMT, Supplier 1=LCSC
U2: library part U_TPD4E05U06, "TVS DIODE 5.5V 14V 10USON", Manufacturer 1="Texas Instruments", Manufacturer 2=ElecSuper, Manufacturer Part Number 2=TPD4E05U06QDQARQ1-ES, Supplier Part Number 1=C81353, Manufacturer Part Number 1=TPD4E05U06QDQARQ1, Mounting Technology=SMT, Supplier 1=LCSC, Supplier 2=Digikey, Supplier Part Number 2=296-40696-1-ND
U3: library part U_TPS631000DRLR, "buck-boost converter 1.5-A output current,", Manufacturer 1="Texas Instruments", Supplier Part Number 1=C5219190, Manufacturer Part Number 1=TPS631000DRLR, Mounting Technology=SMT, Supplier 1=LCSC, Supplier 2=Digikey, Supplier Part Number 2=296-TPS631000DRLRCT-ND
U4: library part U_SN65HVD230DR, "IC TRANSCEIVER HALF 1/1 8SOIC", Manufacturer 1=TI, Supplier Part Number 1=C12084, Manufacturer Part Number 1=SN65HVD230DR, Mounting Technology=SMT, Supplier 1=LCSC
U5A U5B: library part U_TXB0108PWR, "IC 8-Bit Bidirectional Voltage-Level Translator with Auto-Direction Sensing 20-Pin TSSOP (PW)", Manufacturer 1="Texas Instruments", Supplier Part Number 1=C53406, Manufacturer Part Number 1=TXB0108PWR, Mounting Technology=SMT, Supplier 1=LCSC
U6: library part U_AMS1117-3.3, "LDO Voltage Regulators 1A, 3.3V", Manufacturer 1=UMW, Manufacturer 2="Advanced Monolithic Systems", Supplier Part Number 1=C347222, Manufacturer Part Number 1=AMS1117-3.3, Manufacturer Part Number 2=AMS1117-3.3, Mounting Technology=SMT, Supplier 1=LCSC, Supplier 2=LCSC, Supplier Part Number 2=C6186
VR1: library part RP-POT10K-MULTI-TURN-TOP-TH, "TRIMMER 10K OHM 0.5W PC PIN TOP", Manufacturer 1=JIERR, Manufacturer 2=BOURNS, Supplier Part Number 1=C49190453, Manufacturer Part Number 1=3296W-1-103LF, Manufacturer Part Number 2=3296W-1-103LF, Mounting Technology=TH, Supplier 1=LCSC, Supplier 2=LCSC, Supplier Part Number 2=C34846

## Free pads (board coordinates)
  oval 9.801x7.1 hole 2.85 slot 5.403 at 75.8 deg rot 75.8: pt20(107.75,6.25)

## Via types
v1: diameter 0.7, hole 0.3, Top Layer to Bottom Layer, tented both sides, 92 vias
v2: diameter 1, hole 0.5, Top Layer to Bottom Layer, tented both sides, 80 vias
v3: diameter 0.6, hole 0.52, Top Layer to Bottom Layer, tented both sides, 2 vias

## Nets (pads, with @x,y where several pads share a name; then routed paths per layer and width w, separated by ;. In a path a pad name is that pad's centre, name@x,y a point inside that pad or via, vN(x,y) a via of type N, cw(c..) or ccw(c..) an arc to the next point about the centre after c; other vN are vias at no path point)
CAN_N: J2.1 P14.2 U4.6 | length 26.7
  Top Layer w0.125: P14.2@7.381,55.006 7.381,52.323 7.455,52.25 12.25,52.25 15.354,55.354 15.634,55.634 15.707,55.707 17.203,55.707 17.448,55.952 ; U4.6@15.535,64.752 15.535,63.943 16.09,63.388 16.09,62.535 16.09,62.431 18.25,60.271 18.25,56.754 17.448,55.952 ; J2.1@17.185,57.975 17.185,56.215 17.448,55.952
CAN_P: P14.1 R20.1 U4.7 | length 26.4
  Top Layer w0.125: P14.1@7.381,50.006 7.381,51.927 7.455,52 12.354,52 15.81,55.457 17.307,55.457 17.625,55.775 ; U4.7@16.805,64.752 16.805,63.819 16.34,63.354 16.34,62.535 18.427,60.448 18.5,60.375 18.5,56.65 17.625,55.775 ; R20.1@17.375,53.975 17.95,54.55 17.95,55.45 17.625,55.775
GND: C1.1 C2.1 C3.1 C4.1 C5.1 C6.1 C7.1 C8.1 C9.1 C10.1 C11.1 C12.1 C13.1 C14.1 C15.1 C16A.1 C16B.1 C17A.1 C17B.1 C18.1 C19.1 C20.1 C21.1 C22.1 C23A.1 C23B.1 C24A.1 C24B.1 C25.1 C26.1 C27.1 GND1.1 GND2.1 GND3.1 GND4.1 J1.2 MH1.1 MH2.1 MH3.1 MH4.1 MH5.1 MH6.1 MH7.1 MH8.1 MH9.1 MH10.1 MH11.1 MIKROBUS1A.8 MIKROBUS1A.9 MIKROBUS1B.8 MIKROBUS1B.9 P1.3 P2.1 P2.2 P3.1 P3.2 P4.1 P4.2 P4.5 P4.23 P4.49 P4.50 P5.1 P5.2 P5.49 P5.50 P6.1 P6.2 P6.3 P6.4 P6.A1 P6.A12 P6.B1 P6.B12 P7.1 P8.2 P8.20 P9.5 P10.5 P11.5 P12.5 P13.5 P14.3 P14A.8 P14B.8 P15.1 P15.20 P15A.8 P15B.8 pad.pt20 R9.1 R13.1 R14.1 R16.1 R19.1 R24.1 U1.3 U2.3 U2.8 U3.6 U3.7 U4.2 U5A.11 U5B.7 U5B.8 U5B.9 U5B.11 U5B.12 U5B.13 U5B.14 U6.1 VR1.3 | length 138.3
  Top Layer w0.15: v1(17.5,11) 17.453,11.047 17.453,12.1 U2.3@17.405,12.148 U2.8@17.405,12.983 17.405,15.112 17.493,15.2 R13.1@18,15.2 18.162,15.362 18.162,15.662 v1(18.75,16.25) 19.25,15.75 19.25,15.45 R14.1@19.5,15.2
  Top Layer w0.2: R9.1@66.5,31.25 67.25,31.25 v1(67.5,31)
  Top Layer w0.3: v2(11,65.5) C21.1@11,67.55 ; P6.1@12.675,8.545 12.675,8.573 12.952,8.85 14.025,8.85 ; P6.B12@14.025,8.175 14.025,8.85 ; P6.A1@14.025,9.525 14.025,8.85 ; v2(16.5,73.5) 16.5,72.47 C22.1@16.34,72.31 16.805,71.845 U4.2@16.805,69.58 ; v2(17.199,37.402) 18.548,37.402 C14.1@19,36.95 19.5,37.45 20.95,37.45 v2(21,37.5) C15.1@21,35.95 ; C12.1@18.95,26.5 v2(21,26.5) ; P6.B1@19.975,8.175 19.975,8.85 ; P6.A12@19.975,9.525 19.975,8.85 ; R19.1@20,65.95 v2(20,67.5) ; C13.1@20.2,28.75 20.816,29.366 21.366,29.366 v2(21.5,29.5) ; P6.2@21.325,8.545 21.325,8.573 21.048,8.85 19.975,8.85 ; C1.1@24.25,9.05 24.35,9.05 25.7,7.7 v2(25.7,7.523) ; v1(25.25,15.25) 25.75,15.75 U1.3@26.95,15.75 28,15.75 v1(28.75,16.5) ; v1(29.5,18.25) C2.1@30.55,18.25 ; C3.1@33,14 33.75,13.25 v1(33.75,13.2) ; v2(94,84.75) 94,86.95 C19.1@94.05,87 94,87.05 v2(94,88.75)
  Top Layer w0.4: v2(23,28) 25,28 v2(25,29.5) ; v2(23.5,21) 23.615,21.115 23.815,21.115 C11.1@24.75,22.05 ; C5.1@27.5,28 v2(27.5,29.5)
  Top Layer w0.5: v2(7,95.5) 7.135,95.5 7.535,95.1 8.525,95.1 8.967,94.658 v2(10.567,94.658) ; C18.1@9,94.7 v2(9,96.3) ; C20.1@54.25,102.05 55.45,102.05 v2(56.25,101.25) ; v2(149,80) 147.05,80 C17B.1@147,80.05 C17B.1@146.94,80.11 ; 118.75,78.32 v2(118.75,80) ; 118.75,78.32 v2(120.57,78.32) 120.57,80.11 120.515,80.055 118.805,80.055 v2(118.75,80) ; 118.75,78.32 116.315,78.32 116.135,78.5 v2(116,78.5) C16B.1@116,80.05 116.025,80.025 118.725,80.025 v2(118.75,80) ; v2(145.5,77.75) 145.5,80.11 ; v2(145.5,77.75) 145.596,77.846 146.346,77.846 146.94,78.44 C17B.1@146.94,80.11 ; v2(145.5,77.75) v2(143.5,77.75) 143.465,77.785 143.465,80.075 143.43,80.11 145.5,80.11 ; 145.5,80.11 C17B.1@146.94,80.11 ; 158.25,78 v2(160.5,78) 160.535,78.035 160.535,80.075 160.57,80.11 v2(158.315,80.11) ; 158.25,78 158.315,78.065 v2(158.315,80.11) ; 158.25,78 156.635,78 156.135,78.5 v2(156,78.5) C16A.1@156,80.05 156.06,80.11 v2(158.315,80.11) ; 185.25,78 187,78 ; 185.25,78 v2(183.5,78) 183.465,78.035 183.465,80.075 183.43,80.11 183.432,80.112 185.374,80.112 v2(185.376,80.115) ; 185.25,78 185.376,78.126 v2(185.376,80.115) ; v2(185.376,80.115) 185.408,80.082 186.968,80.082 C17A.1@187,80.05 ; 187,78 C17A.1@187,80.05 ; 187,78 188.457,78 189,78.543 v2(189,80) 187.05,80 C17A.1@187,80.05
  Top Layer w0.6: v2(43,28.5) C7.1@43,30.05 v2(45.05,30.05) 45.5,30.5 C8.1@45.5,31.55
  Top Layer w0.8: C4.1@25,28 C5.1@27.5,28 v2(31,28)
  Bottom Layer w0.3: P6.B12@14.025,8.175 P6.A1@14.025,9.525 ; P6.B1@19.975,8.175 19.975,8.85 ; P6.A12@19.975,9.525 19.975,8.85 ; P6.2@21.325,8.545 21.325,8.573 21.048,8.85 19.975,8.85
  other v1: 165,2.5 77.5,35 77.5,40 90.25,61.5 172.5,85
MB1-RX: MIKROBUS1A.14 P15A.3 R3.1 | length 31.7
  Top Layer w0.15: R3.1@152.9,92.5 153.75,92.5 155.338,94.088 176.912,94.088 178.19,92.81 183.43,92.81
MB1-TX: MIKROBUS1A.13 P15A.4 R4.1 | length 32.7
  Top Layer w0.15: R4.1@153,91 154.25,91 154.796,91.546 156.641,93.391 158.235,93.391 160.079,91.546 182.154,91.546 183.43,90.27
MB2-RX: MIKROBUS1B.14 P15B.3 R1.1 | length 6.4
  Top Layer w0.15: v1(148.5,93) 149,92.5 R1.1@149.55,92.5
  Bottom Layer w0.15: 143.43,92.81 148.161,92.81 148.351,93 v1(148.5,93)
MB2-TX: MIKROBUS1B.13 P15B.4 R2.1 | length 6.4
  Top Layer w0.15: v1(148.5,90.5) 149,91 R2.1@149.55,91
  Bottom Layer w0.15: 143.43,90.27 143.555,90.395 148.395,90.395 v1(148.5,90.5)
NetC2_2: C2.2 U1.10 | length 1.9
  Top Layer w0.2: U1.10@31.05,16.75 31.45,16.75 C2.2@31.45,18.25
NetCC1_1: CC1.1 P6.A5 R13.2 U2.4 U2.7 | length 20.6
  Top Layer w0.15: R13.2@18,14.3 17.905,14.205 U2.7@17.905,12.983 17.905,11.718 18.623,11 v1(18.75,11)
  Bottom Layer w0.15: P6.A5@15.725,9.525 15.725,9.999 16.066,10.34 18.09,10.34 v1(18.75,11) 19.516,10.234 22.016,10.234 24,8.25 24,5.25 CC1.1@26.5,2.75
NetCC2_1: CC2.1 P6.B5 R14.2 U2.5 U2.6 | length 27.9
  Top Layer w0.15: U2.5@18.405,12.148 U2.5@18.405,12.225 ; v1(19.5,13) 18.75,12.25 18.43,12.25 U2.5@18.405,12.225 ; R14.2@19.5,14.3 18.43,13.23 18.43,13.008 U2.6@18.405,12.983 U2.5@18.405,12.225
  Bottom Layer w0.15: P6.B5@18.275,8.175 18.275,7.525 17.75,7 ; v1(19.5,13) 16.408,13 13.401,9.992 13.401,7.599 14,7 17.75,7 ; CC2.1@23.75,2.75 21.25,2.75 17.75,6.25 17.75,7
NetJ2_2: J2.2 R20.2 | length 4.2
  Top Layer w0.125: J2.2@19.725,57.975 19.725,54.525 R20.2@20.275,53.975
NetL1_1: L1.1 U3.3
NetL1_2: L1.2 U3.2
NetP1_4: P1.4 R7.2 | length 5
  Top Layer w0.15: P1.4@60.88,27.94 60.88,31.33 R7.2@62.05,32.5
NetP4_6: P4.6
NetP4_8: P4.8
NetP4_9: P4.9
NetP4_12: P4.12
NetP4_16: P4.16
NetP4_24: P4.24
NetP4_34: P4.34
NetP5_7: P5.7
NetP5_8: P5.8
NetP5_9: P5.9
NetP5_10: P5.10
NetP5_11: P5.11
NetP5_12: P5.12
NetP5_16: P5.16
NetP5_18: P5.18
NetP5_21: P5.21
NetP5_25: P5.25
NetP5_28: P5.28
NetP5_29: P5.29
NetP5_30: P5.30
NetP5_31: P5.31
NetP5_32: P5.32
NetP5_35: P5.35
NetP5_37: P5.37
NetP5_39: P5.39
NetP5_41: P5.41
NetP5_42: P5.42
NetP5_44: P5.44
NetP5_48: P5.48
NetP8_3: P8.3 P15.3 VR1.2 | length 80.9
  Top Layer w0.3: VR1.2@98.75,12.21 102.46,12.21 106.75,16.5 119,16.5 124.021,11.479 124.021,7.539 122.734,6.252 122.734,3.04 124.274,1.5 160.857,1.5 162.121,2.764 162.121,5.009
NetP8_4: P8.4 P15.7 U5A.20
NetP8_5: P8.5 P15.8 U5A.18
NetP8_6: P8.6 P15.9 U5A.17
NetP8_7: P8.7 P15.10 U5A.16
NetP8_8: P8.8 P15.11 U5A.15
NetP8_9: P8.9 P15.12 U5A.14
NetP8_10: P8.10 P15.13 U5A.13
NetP8_11: P8.11 P15.14 U5A.12
NetP8_12: P8.12 P15.16 U5B.20
NetP8_13: P8.13 P15.15 R23.1 R24.2 U5B.18
NetP8_14: P8.14 P15.17 R21.1
NetP8_15: P8.15 P15.5 U5B.17
NetP8_16: P8.16 P15.4 U5B.16
NetP8_17: P8.17 P15.6 U5B.15
NetP8_18: P8.18 P15.18 VR1.1 | length 82.5
  Top Layer w0.3: VR1.1@98.74,14.75 99.99,13.5 101.75,13.5 106,17.75 120,17.75 125.25,12.5 125.25,6.238 124.021,5.009 124.021,3.754 125.411,2.364 159.471,2.364 160.851,3.744 160.851,6.269 162.121,7.539
NetP8_19: P8.19 P15.19 R22.2
NetR15_1: R15.1 U1.5 | length 4.3
  Top Layer w0.15: U1.5@26.95,14.75 28.502,14.75 30.003,13.25 30.05,13.25 R15.1@30.3,13 R15.1@30.3,12.74
NetR15_2: R15.2 U1.6 | length 1.8
  Top Layer w0.15: U1.6@31.05,14.75 31.05,13.15 R15.2@31.2,13
NetR18_1: R18.1 U3.5 | length 1.3
  Top Layer w0.3: R18.1@156.75,14.45 157.95,14.45 v1(158,14.5)
NetR19_2: R19.2 U4.8 | length 2.1
  Top Layer w0.15: U4.8@18.075,64.752 18.075,64.832 18.293,65.05 R19.2@20,65.05
PA1/TIM-2/5: MIKROBUS1B.16 P4.11 P15B.1 | length 92.3
  Top Layer w0.15: P4.11@82.55,48.26 82.81,48 84.115,48 84.958,48.843 84.958,58.958 90.604,64.604 113.104,64.604 134.5,86 134.5,94 138.39,97.89 143.43,97.89
PA2/USART2-TX: P1.5 P4.14 R5.2 R8.2 | length 63
  Top Layer w0.15: P1.5@58.34,27.94 58.34,31.464 61.726,34.849 65.323,34.849 65.62,35.147 R8.2@65.62,35.865 R5.2@67.26,35.865 67.26,35.24 67.5,35 70,35 73,32 83.75,32 86.75,35 86.75,52 v1(87.25,52.5)
  Bottom Layer w0.15: P4.14@80.01,50.8 80.322,51.112 81.095,51.112 81.983,52 86.75,52 v1(87.25,52.5)
PA3/USART2-RX: P4.13 R6.2 R7.1 R9.2 R10.2 | length 51.7
  Top Layer w0.15: R7.1@62.95,32.5 64.974,32.5 65.62,33.146 R10.2@65.62,33.96 R6.2@67.26,33.96 67.26,32.74 ; R9.2@66.5,32.15 67.09,32.74 67.26,32.74 ; v1(87.75,50.75) 87.75,34.5 84.25,31 69,31 67.26,32.74
  Bottom Layer w0.15: P4.13@82.55,50.8 82.575,50.775 87.725,50.775 v1(87.75,50.75)
PA5/SPI1-CLK: P4.15 P10.4 | length 113.6
  Bottom Layer w0.15: P10.4@12.62,84.77 10.25,82.4 10.25,79.5 11.301,78.449 17.207,78.449 21.218,74.437 21.218,49.236 28.496,41.959 47.709,41.959 57.825,52.075 81.285,52.075 P4.15@82.55,53.34
PA6/SPI1-MISO: P4.18 P10.3 | length 100.1
  Bottom Layer w0.15: P10.3@12.62,82.23 17.02,82.23 22.724,76.526 22.724,51.897 27.598,47.023 49.773,47.023 58.63,55.88 P4.18@80.01,55.88
PA7/SPI1-MOSI: P4.17 P10.2 | length 104.1
  Bottom Layer w0.15: P10.2@12.62,79.69 17.724,79.69 22.086,75.329 22.086,49.922 27.544,44.464 48.714,44.464 58.884,54.634 81.304,54.634 P4.17@82.55,55.88
PA8/I2C3-SCL: MIKROBUS1A.12 P5.43 P12.3 P15A.5 | length 172.6
  Top Layer w0.15: v1(64,72.5) 64.078,72.422 98.167,72.422 106.77,81.025 P12.3@106.77,82.61
  Bottom Layer w0.15: P5.43@31.75,88.9 34.068,88.9 50.468,72.5 v1(64,72.5) ; P12.3@106.77,82.61 113.505,75.875 128.312,75.875 129.762,74.425 167.925,74.425 181.23,87.73 183.43,87.73
PA15/D3: P5.40 P9.4 | length 25.7
  Top Layer w0.15: P9.4@5,84.77 6.299,86.069 22.654,86.069 24.903,83.82 P5.40@29.21,83.82
PB0/D1: P4.22 P11.4 | length 55.4
  Top Layer w0.15: v1(93.75,81) 94.865,81 104.23,90.365 P11.4@104.23,91.5
  Bottom Layer w0.15: P4.22@80.01,60.96 78.04,60.96 73,66 73,72.558 75.388,74.945 86.445,74.945 92.425,80.925 93.675,80.925 v1(93.75,81)
PB1/TIM-3/8: MIKROBUS1A.16 P4.21 P15A.1 | length 135.4
  Bottom Layer w0.15: P4.21@82.55,60.96 84.01,59.5 103.3,59.5 106.3,62.5 171.624,62.5 187,77.876 187,96.5 185.61,97.89 183.43,97.89
PB5/D0: P5.26 P9.1 | length 36.6
  Top Layer w0.15: P9.1@5,77.15 6.35,78.5 21.25,78.5 v1(23.25,80.5)
  Bottom Layer w0.15: v1(23.25,80.5) 27,76.75 27,68.25 P5.26@29.21,66.04
PB6/I2C1-SCL: MIKROBUS1B.12 P5.23 P15B.5 | length 157.9
  Top Layer w0.15: P5.23@31.75,63.5 37.044,63.5 39,65.456 39,74 49.5,84.5 72.5,84.5 74.5,86.5 74.5,96.5 78.102,100.102 92.898,100.102 95.532,97.468 114.468,97.468 118.5,101.5 145,101.5 146.75,99.75 146.75,91.05 143.43,87.73
PB7/D1: P5.24 P9.2 | length 37.6
  Top Layer w0.15: P9.2@5,79.69 6.31,81 v1(21.25,81)
  Bottom Layer w0.15: v1(21.25,81) 21.282,81 26,76.282 26,66.71 P5.24@29.21,63.5
PB8/CS0: P5.19 U5B.6 | length 73.8
  Top Layer w0.15: v1(48,60.5) 50.5,60.5 v1(61,50) ; v1(92.75,48.5) 93.227,48.977 93.227,49.727 94.175,50.675 95.05,50.675
  Bottom Layer w0.15: P5.19@31.75,58.42 45.92,58.42 v1(48,60.5) ; v1(61,50) 66.5,44.5 88.75,44.5 v1(92.75,48.5)
PB9/I2C1-SDA: MIKROBUS1B.11 P5.20 P15B.6 | length 153.6
  Top Layer w0.15: P5.20@29.21,58.42 27,56.21 27,53 27.897,52.103 42.647,52.103 52.893,41.857 83.509,41.857 85.883,44.231 85.883,58.341 91.499,63.957 115.207,63.957 136.44,85.19 143.43,85.19
PB11/UART3-RX: P4.35 R1.2 R3.2 | length 81.2
  Top Layer w0.15: v1(147.25,89) 147.25,93.25 148,94 149.91,94 150.45,93.46 R1.2@150.45,92.5 R3.2@152,92.5
  Bottom Layer w0.15: P4.35@82.55,78.74 84.599,78.74 91.962,86.103 117.397,86.103 119.5,84 132,84 137,89 v1(147.25,89)
PB12/CS: MIKROBUS1B.3 P4.36 P14B.3 | length 49.1
  Top Layer w0.15: P4.36@80.01,78.74 81.27,80 85.639,80 90.5,84.861 90.5,89.5 93.81,92.81 120.57,92.81
PB13/SPI2-SCK: MIKROBUS1A.4 MIKROBUS1B.4 P4.37 P14A.4 P14B.4 | length 102.4
  Top Layer w0.15: P4.37@82.55,81.28 84.377,81.28 87.246,84.149 87.246,89.181 92.124,94.058 121.41,94.058 122.396,93.071 122.396,92.096 120.57,90.27
  Bottom Layer w0.15: 120.57,90.27 124.27,90.27 136.75,102.75 145.25,102.75 157.73,90.27 160.57,90.27
PB14/D2: P4.38 P12.1 | length 45.8
  Bottom Layer w0.15: P4.38@80.01,81.28 78.448,81.28 77.307,80.139 77.307,78.693 78.5,77.5 87.356,77.5 92.106,82.25 95.441,82.25 97.065,80.625 99.52,80.625 100.418,81.523 100.418,83.491 101.389,84.462 109.998,84.462 P12.1@111.85,82.61
PB15/SPI2-MOSI: MIKROBUS1A.6 MIKROBUS1B.6 P4.39 P14A.6 P14B.6 | length 113.5
  Top Layer w0.15: P4.39@82.55,83.82 85,86.27 85,91.061 90.489,96.549 122.385,96.549 123.457,95.477 123.457,88.077 120.57,85.19
  Bottom Layer w0.15: 120.57,85.19 124.19,85.19 139.371,100.371 143.826,100.371 159.006,85.19 160.57,85.19
PC1/ADC123-IN11: MIKROBUS1B.1 P4.7 P14B.1 | length 104.1
  Top Layer w0.15: P4.7@82.55,43.18 84.407,45.037 84.407,46.238 83.676,46.968 78.965,46.968 77,48.934 77,65 79.302,67.302 95.675,67.302 104.628,76.255 120.505,76.255 125.5,81.25 125.5,96 123.61,97.89 120.57,97.89
PC2/SPI2-MISO: MIKROBUS1A.5 MIKROBUS1B.5 P4.10 P14A.5 P14B.5 | length 114.5
  Top Layer w0.15: P4.10@80.01,45.72 78.28,45.72 75.5,48.5 75.5,66.964 78.388,69.852 96.878,69.852 104.526,77.5 109.904,77.5 113.773,81.369 113.773,84.177 117.326,87.73 120.57,87.73
  Bottom Layer w0.15: 133.175,98.75 136.874,102.45 143.55,102.45 158.27,87.73 160.57,87.73
PC4/D0: P4.20 P11.1 | length 68.3
  Top Layer w0.15: v1(75.5,76.75) 76.25,77.5 100.232,77.5 103,80.268 103,83.438 107.312,87.75 108.1,87.75 P11.1@111.85,91.5
  Bottom Layer w0.15: v1(75.5,76.75) 72,73.25 72,65 78.58,58.42 P4.20@80.01,58.42
PC5/ADC12-IN15: MIKROBUS1A.1 P4.19 P14A.1 | length 174.8
  Bottom Layer w0.15: P4.19@82.55,58.42 93.761,58.42 95.715,56.465 101.285,56.465 102,55.75 102,52.481 102.5,51.981 113.731,51.981 121.75,60 171.321,60 191.5,80.179 191.5,95.5 186.5,100.5 181,100.5 178.39,97.89 163.61,97.89 ; 160.57,97.89 163.61,97.89 ; 163.5,98 163.61,97.89
PC6/UART6-TX/TIM-3: P5.47 TX6.1 | length 11.2
  Top Layer w0.15: P5.47@31.75,93.98 33.23,93.98 34.25,95 34.25,97.75 31.75,100.25 TX6.1@31.75,102.193
PC8/D3: P5.45 P12.2 | length 91.2
  Top Layer w0.15: P5.45@31.75,91.44 68.06,91.44 72.425,87.075 72.425,86.575 v1(72.5,86.5) ; v1(109.25,87.25) 109.28,87.22 109.28,82.64 P12.2@109.31,82.61
  Bottom Layer w0.15: v1(72.5,86.5) 74.649,86.5 78.55,82.599 80.901,82.599 81.273,82.227 81.273,80.437 81.71,80 84.359,80 90.994,86.635 108.635,86.635 v1(109.25,87.25)
PC9/I2C3-SDA: MIKROBUS1A.11 P5.46 P12.4 P15A.6 | length 176.9
  Top Layer w0.15: v1(64,75) 64.081,74.919 99.218,74.919 104.23,79.931 P12.4@104.23,82.61
  Bottom Layer w0.15: P5.46@29.21,91.44 30.468,90.182 36.318,90.182 51.5,75 v1(64,75) ; P12.4@104.23,82.61 106.305,80.535 108.421,80.535 113.381,75.575 128.188,75.575 133.263,70.5 166.5,70.5 181.19,85.19 183.43,85.19
PC11/D2: P5.38 P9.3 | length 25.6
  Top Layer w0.15: P9.3@5,82.23 6.215,83.445 23.358,83.445 25.523,81.28 P5.38@29.21,81.28
PD0/CAN-RX: P5.36 U4.4 | length 23.1
  Top Layer w0.15: U4.4@14.265,69.58 14.265,71.735 13,73 13,74 14.5,75.5 24.5,75.5 27.74,78.74 P5.36@29.21,78.74
PD1/CAN-TX: P5.33 U4.1 | length 17.6
  Top Layer w0.15: U4.1@18.075,69.58 18.075,71.575 19,72.5 23.208,72.5 25.615,74.906 30.456,74.906 P5.33@31.75,76.2
PD2/INT: MIKROBUS1A.15 P5.34 P15A.2 | length 192.1
  Top Layer w0.15: v1(64,70) v1(74,70)
  Bottom Layer w0.15: P5.34@29.21,76.2 30.515,74.895 44.605,74.895 49.5,70 v1(64,70) ; v1(74,70) 74,66.5 78.24,62.26 83.666,62.26 85.426,60.5 102.997,60.5 106.747,64.25 171.75,64.25 186.5,79 186.5,94 185.15,95.35 183.43,95.35
PD7/A0: P5.27 U5B.1 | length 88.3
  Top Layer w0.15: v1(42.75,60.5) 45,58.25 50.25,58.25 v1(59,49.5) ; v1(93.5,55.5) 94.474,54.526 94.474,54.075 94.624,53.925 95.05,53.925
  Bottom Layer w0.15: P5.27@31.75,68.58 34.92,68.58 38.782,64.718 38.782,64.468 v1(42.75,60.5) ; v1(59,49.5) 66.494,42.006 87.732,42.006 95,49.273 95,52.5 94,53.5 93.151,53.5 92.5,54.151 92.5,55 92.925,55.425 93.425,55.425 v1(93.5,55.5)
PD8/UART3-TX: P4.40 R2.2 R4.2 | length 107.2
  Top Layer w0.15: R2.2@150.45,91 R4.2@152.05,91 ; R4.2@152.1,91 R4.2@152.05,91 ; v1(158,92.25) 157,92.25 154,89.25 152.5,89.25 152.05,89.7 R4.2@152.05,91
  Bottom Layer w0.15: P4.40@80.01,83.82 81.286,85.096 86.346,85.096 87.75,86.5 88.49,87.24 107.37,87.24 108.447,88.316 110.223,88.316 111.362,87.177 113.927,87.177 116.5,89.75 116.5,98.053 122.25,103.803 146.447,103.803 v1(158,92.25)
PD9/A1: P4.41 U5B.3 | length 63.5
  Top Layer w0.15: v1(92.905,52.767) 93.054,52.767 93.196,52.625 95.05,52.625
  Bottom Layer w0.15: P4.41@82.55,86.36 81.277,87.633 72.133,87.633 71,86.5 71,64.5 78.346,57.154 85.346,57.154 89.733,52.767 v1(92.905,52.767)
PD10/A2: P4.42 U5B.4 | length 81.2
  Top Layer w0.15: v1(66.5,50.5) 61.75,55.25 61.75,75.75 63,77 73,77 77.5,81.5 77.5,83.85 P4.42@80.01,86.36 ; v1(93,51.5) 93.475,51.975 95.05,51.975
  Bottom Layer w0.15: v1(66.5,50.5) 67.455,49.545 89.545,49.545 91.5,51.5 v1(93,51.5)
PD11/A3: P4.43 U5B.5 | length 91.3
  Top Layer w0.15: v1(64.5,49.5) 60.25,53.75 60.25,77 62.25,79 72,79 76.5,83.5 76.5,86 78.076,87.576 81.226,87.576 P4.43@82.55,88.9 ; v1(92.5,50) 93.825,51.325 95.05,51.325
  Bottom Layer w0.15: v1(64.5,49.5) 66.969,47.031 89.531,47.031 v1(92.5,50)
PD12: P4.44 P13.2 | length 23.2
  Top Layer w0.15: P13.2@69.29,103.75 69.29,99.46 72,96.75 72,90.25 v1(73.35,88.9)
  Bottom Layer w0.15: v1(73.35,88.9) P4.44@80.01,88.9
PD13: P4.45 P13.1 | length 21.4
  Top Layer w0.15: P13.1@71.83,103.75 73.25,102.33 v1(73.25,92.75)
  Bottom Layer w0.15: v1(73.25,92.75) 81.24,92.75 P4.45@82.55,91.44
PD14: P4.46 P13.4 | length 24.5
  Top Layer w0.15: P13.4@64.21,103.75 64.21,97.54 v1(70.25,91.5)